# EAGLE board adapter (EAGLE 7.1.0)
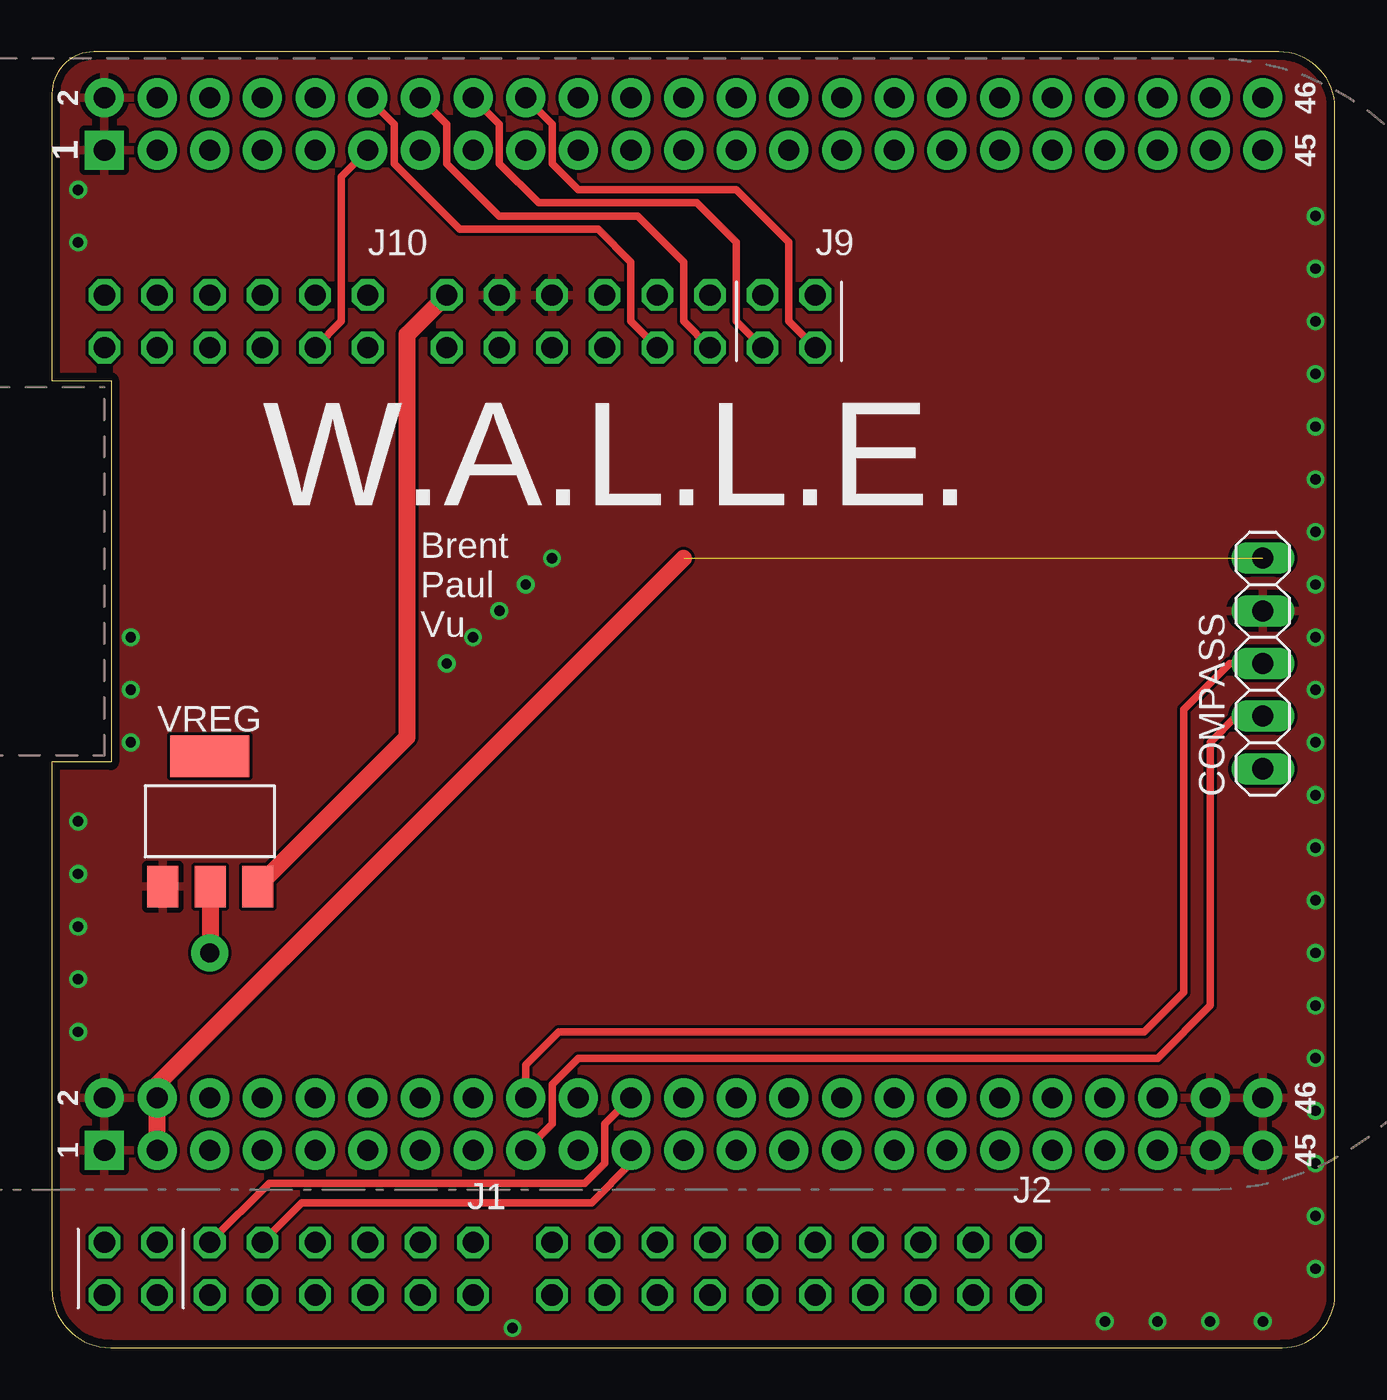
[diagram p0: board, top side]
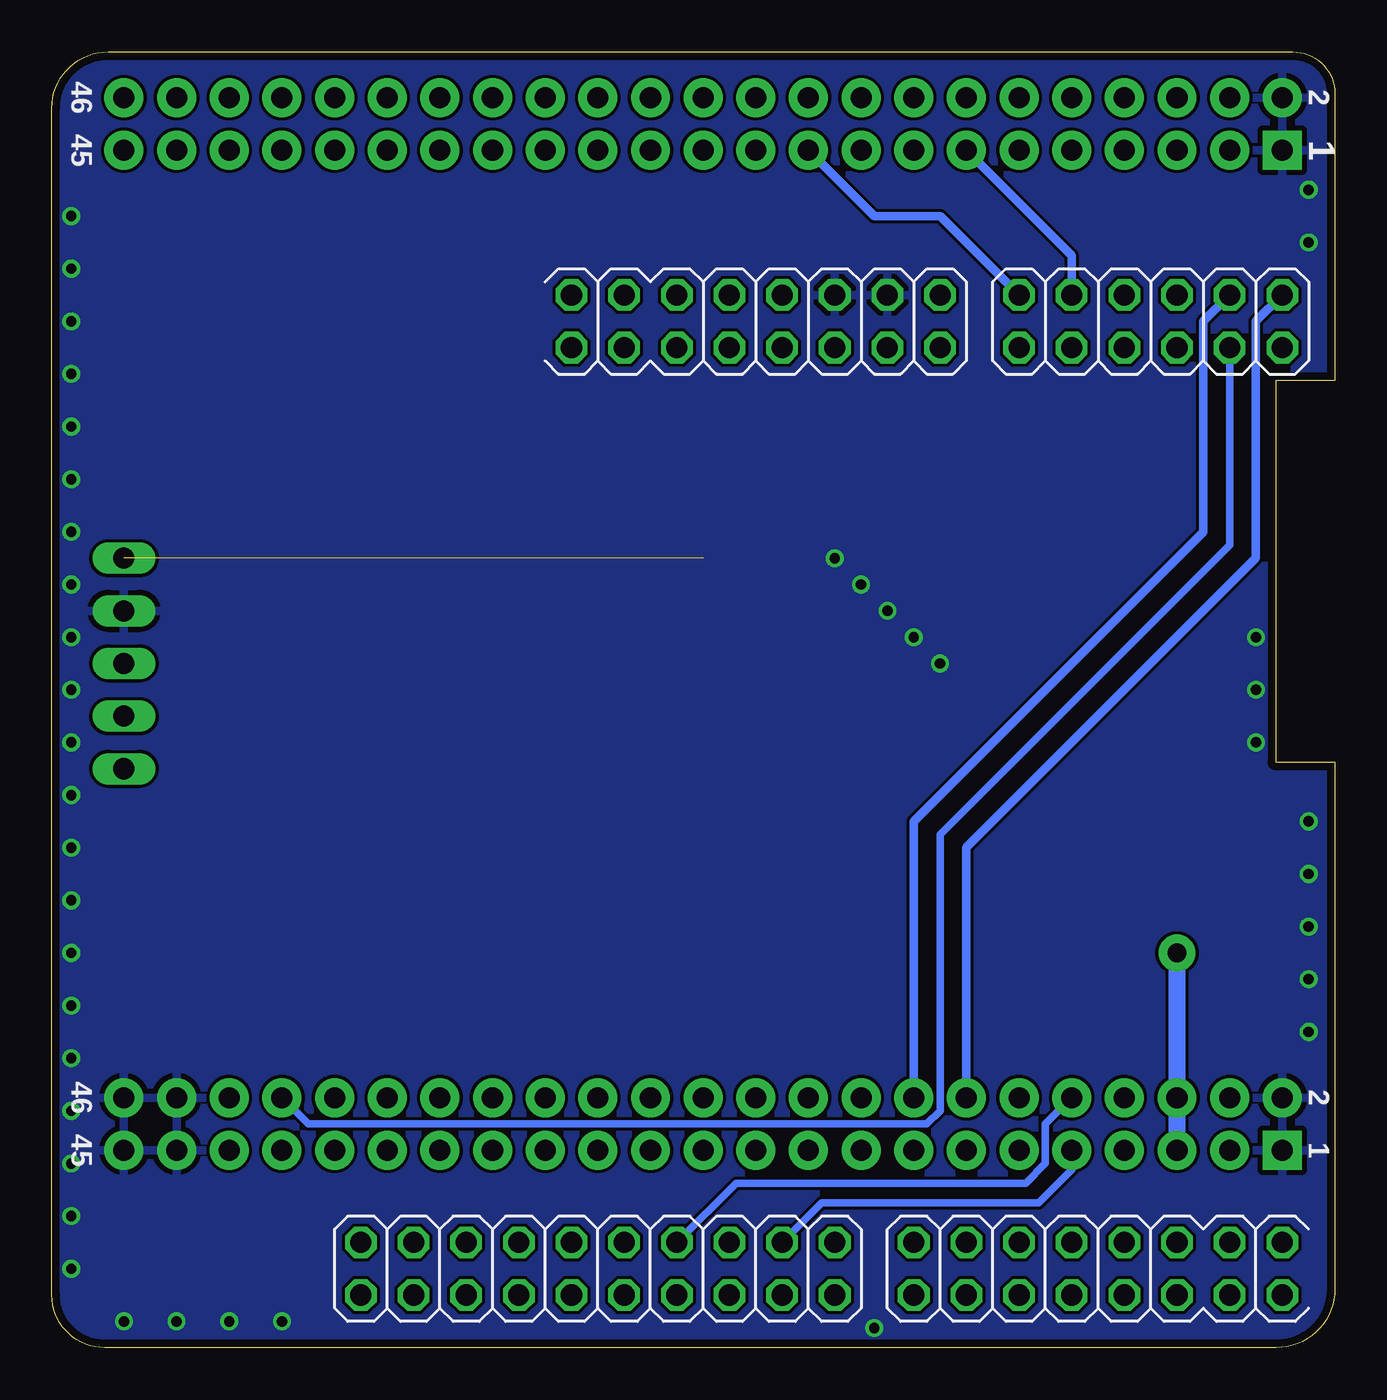
[diagram p1: board, bottom side, seen from below]

Size 61.9 x 62.54 mm. Coordinates in mm from the lower left corner, seen from the top.
Outline: 0,28.26 0,2.84 arc90 2.84,0 59.35,0 arc90 61.9,2.55 61.9,59.82 arc90 59.19,62.54 2.02,62.54 arc90 0,60.51 0,46.67 2.86,46.67 2.86,28.26 0,28.26
Copper layers (1*16): Top 0.0356mm / dielectric 1.5011mm / Bottom 0.0356mm
Design rules "LaenPCBOrder": minimum track width 6mil, minimum drill 13mil, track to track 6mil, track to pad 6mil, pad to pad 6mil, via to via 6mil, smd to smd 6mil, copper to edge 15mil, drill to drill 6mil, minimum pad ring 7mil, minimum via ring 7mil, stop-mask expansion 3mil, vias tented up to drill 0mil, thermal gap 10mil

## Footprints (pad centres in the part's own frame; a part is rotated, then mirrored left to right if it is on the bottom)
1X05 = drill 1.016 long: 1 -5.08,0; 2 -2.54,0; 3 0,0; 4 2.54,0; 5 5.08,0
2X08 = drill 1.016 octagon: 1 -8.89,-1.27; 2 -8.89,1.27; 3 -6.35,-1.27; 4 -6.35,1.27; 5 -3.81,-1.27; 6 -3.81,1.27; 7 -1.27,-1.27; 8 -1.27,1.27; 9 1.27,-1.27; 10 1.27,1.27; 11 3.81,-1.27; 12 3.81,1.27; 13 6.35,-1.27; 14 6.35,1.27; 15 8.89,-1.27; 16 8.89,1.27
2X10 = drill 1.016 octagon: 1 -11.43,-1.27; 2 -11.43,1.27; 3 -8.89,-1.27; 4 -8.89,1.27; 5 -6.35,-1.27; 6 -6.35,1.27; 7 -3.81,-1.27; 8 -3.81,1.27; 9 -1.27,-1.27; 10 -1.27,1.27; 11 1.27,-1.27; 12 1.27,1.27; 13 3.81,-1.27; 14 3.81,1.27; 15 6.35,-1.27; 16 6.35,1.27; 17 8.89,-1.27; 18 8.89,1.27; 19 11.43,-1.27; 20 11.43,1.27
2X06 = drill 1.016 octagon: 1 -6.35,-1.27; 2 -6.35,1.27; 3 -3.81,-1.27; 4 -3.81,1.27; 5 -1.27,-1.27; 6 -1.27,1.27; 7 1.27,-1.27; 8 1.27,1.27; 9 3.81,-1.27; 10 3.81,1.27; 11 6.35,-1.27; 12 6.35,1.27
BEAGLE_BONE_BLACK_CAPE = drill 1.016 pad 1.88 square: P8.1 20.32,50.165; P9.1 20.32,1.905 | drill 1.016 pad 1.88: P8.2 20.32,52.705; P8.3 22.86,50.165; P8.4 22.86,52.705; P8.5 25.4,50.165; P8.6 25.4,52.705; P8.7 27.94,50.165; P8.8 27.94,52.705; P8.9 30.48,50.165; P8.10 30.48,52.705; P8.11 33.02,50.165; P8.12 33.02,52.705; P8.13 35.56,50.165; P8.14 35.56,52.705; P8.15 38.1,50.165; P8.16 38.1,52.705; P8.17 40.64,50.165; P8.18 40.64,52.705; P8.19 43.18,50.165; P8.20 43.18,52.705; P8.21 45.72,50.165; P8.22 45.72,52.705; P8.23 48.26,50.165; P8.24 48.26,52.705; P8.25 50.8,50.165; P8.26 50.8,52.705; P8.27 53.34,50.165; P8.28 53.34,52.705; P8.29 55.88,50.165; P8.30 55.88,52.705; P8.31 58.42,50.165; P8.32 58.42,52.705; P8.33 60.96,50.165; P8.34 60.96,52.705; P8.35 63.5,50.165; P8.36 63.5,52.705; P8.37 66.04,50.165; P8.38 66.04,52.705; P8.39 68.58,50.165; P8.40 68.58,52.705; P8.41 71.12,50.165; P8.42 71.12,52.705; P8.43 73.66,50.165; P8.44 73.66,52.705; P8.45 76.2,50.165; P8.46 76.2,52.705; P9.2 20.32,4.445; P9.3 22.86,1.905; P9.4 22.86,4.445; P9.5 25.4,1.905; P9.6 25.4,4.445; P9.7 27.94,1.905; P9.8 27.94,4.445; P9.9 30.48,1.905; P9.10 30.48,4.445; P9.11 33.02,1.905; P9.12 33.02,4.445; P9.13 35.56,1.905; P9.14 35.56,4.445; P9.15 38.1,1.905; P9.16 38.1,4.445; P9.17 40.64,1.905; P9.18 40.64,4.445; P9.19 43.18,1.905; P9.20 43.18,4.445; P9.21 45.72,1.905; P9.22 45.72,4.445; P9.23 48.26,1.905; P9.24 48.26,4.445; P9.25 50.8,1.905; P9.26 50.8,4.445; P9.27 53.34,1.905; P9.28 53.34,4.445; P9.29 55.88,1.905; P9.30 55.88,4.445; P9.31 58.42,1.905; P9.32 58.42,4.445; P9.33 60.96,1.905; P9.34 60.96,4.445; P9.35 63.5,1.905; P9.36 63.5,4.445; P9.37 66.04,1.905; P9.38 66.04,4.445; P9.39 68.58,1.905; P9.40 68.58,4.445; P9.41 71.12,1.905; P9.42 71.12,4.445; P9.43 73.66,1.905; P9.44 73.66,4.445; P9.45 76.2,1.905; P9.46 76.2,4.445
SOT223 = smd 1.499 x 2.007: 1 -2.261,-3.15; 2 0.025,-3.15; 3 2.311,-3.15 | smd 3.81 x 2.007: 4 0,3.15

## Placement (x,y rotation side)
COMPASS  HMC5883L  [1X05]  58.42,33.02 90 top
J1  [2X08]  11.43,3.81 180 bottom
J2  [2X10]  35.56,3.81 180 bottom
J9  [2X08]  27.94,49.53 0 bottom
J10  [2X06]  8.89,49.53 0 bottom
U$1  BEAGLE_BONE_BLACK_CAPE  [BEAGLE_BONE_BLACK_CAPE]  -17.78,7.62 0 top
VREG  REG1117  [SOT223]  7.62,25.4 0 top

## Library data of the parts
COMPASS J1 J2 J9 J10 = pinhead
U$1 = bbb
VREG = burr-brown; MPN: REG1117; OC_FARNELL: 1097566; OC_NEWARK: 14P6981

## Nets
3.3V: COMPASS.5 U$1.P9.3 U$1.P9.4
5V: U$1.P9.5 U$1.P9.6 VREG.2
BATSENSE: J10.9 U$1.P9.40
GND: COMPASS.4 J9.12 J9.14 U$1.P8.1 U$1.P8.2 U$1.P9.1 U$1.P9.2 U$1.P9.43 U$1.P9.44 U$1.P9.45 U$1.P9.46 VREG.1
HB_EN: J10.3 U$1.P8.11
I2C1_SCL: COMPASS.2 U$1.P9.17
I2C1_SDA: COMPASS.3 U$1.P9.18
LED1: J9.1 U$1.P8.18
LED2: J9.3 U$1.P8.16
LED3: J9.5 U$1.P8.14
LED4: J9.7 U$1.P8.12
PWM0A: J1.5 U$1.P9.22
PWM0B: J1.7 U$1.P9.21
PWM1A: J10.12 U$1.P9.14
PWM1B: J10.10 U$1.P9.16
PWM2A: J10.2 U$1.P8.19
PWM2B: J10.4 U$1.P8.13
PWR_SW: J2.3 U$1.P9.9
RST_SW: J2.7 U$1.P9.10
VBAT: J9.16 VREG.3

## Tracks (layer width: path | path; a pad name or v marks a point on that pad's centre or on a via)
3.3V  (1 unrouted)
  Top 0.813: U$1.P9.3 U$1.P9.4 5.08,12.7 30.48,38.1
5V  (via drill 0.9 pad 1.78)
  Top 0.813: VREG.2 7.64,19.07 v7.62,19.05
  Bottom 0.813: U$1.P9.5 U$1.P9.6 v7.62,19.05
BATSENSE
  Bottom 0.356: J10.9 5.08,38.73 19.05,24.77 19.05,11.43 19.68,10.79 49.53,10.79 U$1.P9.40
GND  (via drill 0.5)
  other vias: 60.96,52.07 60.96,49.53 60.96,46.99 60.96,44.45 60.96,41.91 60.96,39.37 60.96,36.83 60.96,34.29 60.96,31.75 60.96,29.21 60.96,26.67 60.96,24.13 60.96,21.59 60.96,19.05 60.96,16.51 60.96,13.97 60.96,11.43 60.96,8.89 60.96,6.35 60.96,3.81 58.42,1.27 55.88,1.27 53.34,1.27 50.8,1.27 22.23,0.95 1.27,15.24 1.27,17.78 1.27,20.32 1.27,22.86 1.27,25.4 3.81,29.21 3.81,31.75 3.81,34.29 60.96,54.61 1.27,53.34 1.27,55.88 24.13,38.1 19.05,33.02 20.32,34.29 21.59,35.56 22.86,36.83
  pour Top: -2.54,64.77 -2.54,-1.27 63.5,-1.27 63.5,64.77
  pour Bottom: -2.54,64.77 63.5,64.77 63.5,-1.27 -2.54,-1.27
HB_EN
  Top 0.356: J10.3 13.97,49.53 13.97,56.51 U$1.P8.11
I2C1_SCL
  Top 0.356: U$1.P9.17 24.13,10.79 24.13,12.7 25.4,13.97 53.34,13.97 55.88,16.51 55.88,29.21 57.15,30.48 COMPASS.2
I2C1_SDA
  Top 0.356: COMPASS.3 56.83,33.02 54.61,30.8 54.61,17.14 52.7,15.24 24.45,15.24 22.86,13.65 U$1.P9.18
LED1
  Top 0.356: U$1.P8.18 24.13,59.05 24.13,57.15 25.4,55.88 33.02,55.88 35.56,53.34 35.56,49.53 J9.1
LED2
  Top 0.356: U$1.P8.16 21.59,59.05 21.59,57.15 23.49,55.24 31.11,55.24 33.02,53.34 33.02,49.53 J9.3
LED3
  Top 0.356: U$1.P8.14 19.05,59.05 19.05,57.15 21.59,54.61 28.26,54.61 30.48,52.39 30.48,49.53 J9.5
LED4
  Top 0.356: U$1.P8.12 16.51,59.05 16.51,57.15 19.68,53.97 26.35,53.97 27.94,52.39 27.94,49.53 J9.7
PWM0A
  Top 0.356: J1.5 10.48,7.94 25.72,7.94 26.67,8.89 26.67,10.79 U$1.P9.22
PWM0B
  Top 0.356: J1.7 12.06,6.99 26.03,6.99 27.94,8.89 U$1.P9.21
PWM1A
  Bottom 0.406: J10.12 3.81,49.53 3.81,38.1 17.78,24.13 U$1.P9.14
PWM1B
  Bottom 0.406: J10.10 6.35,49.53 6.35,39.37 20.32,25.4 U$1.P9.16
PWM2A
  Bottom 0.406: J10.2 19.05,54.61 22.23,54.61 U$1.P8.19
PWM2B
  Bottom 0.406: J10.4 12.7,52.7 U$1.P8.13
PWR_SW
  Bottom 0.356: U$1.P9.9 12.7,8.57 14.29,6.99 24.77,6.99 J2.3
RST_SW
  Bottom 0.356: U$1.P9.10 13.97,10.79 13.97,8.89 14.92,7.94 28.89,7.94 J2.7
VBAT
  Top 0.813: VREG.3 17.14,29.46 17.14,48.89 J9.16

## Text on the board
tPlace: W.A.L.L.E. | Brent / Paul / Vu